# Altium PCB DK_LOCK_V1.0.PcbDoc
Units mm, origin at the board's own origin, x right, y up, seen from the top; angles counter-clockwise.
Board outline 115 x 43 mm, 2 copper layers (Top Layer, Bottom Layer); 92 components, 68 nets, 359 pads, 158 vias.
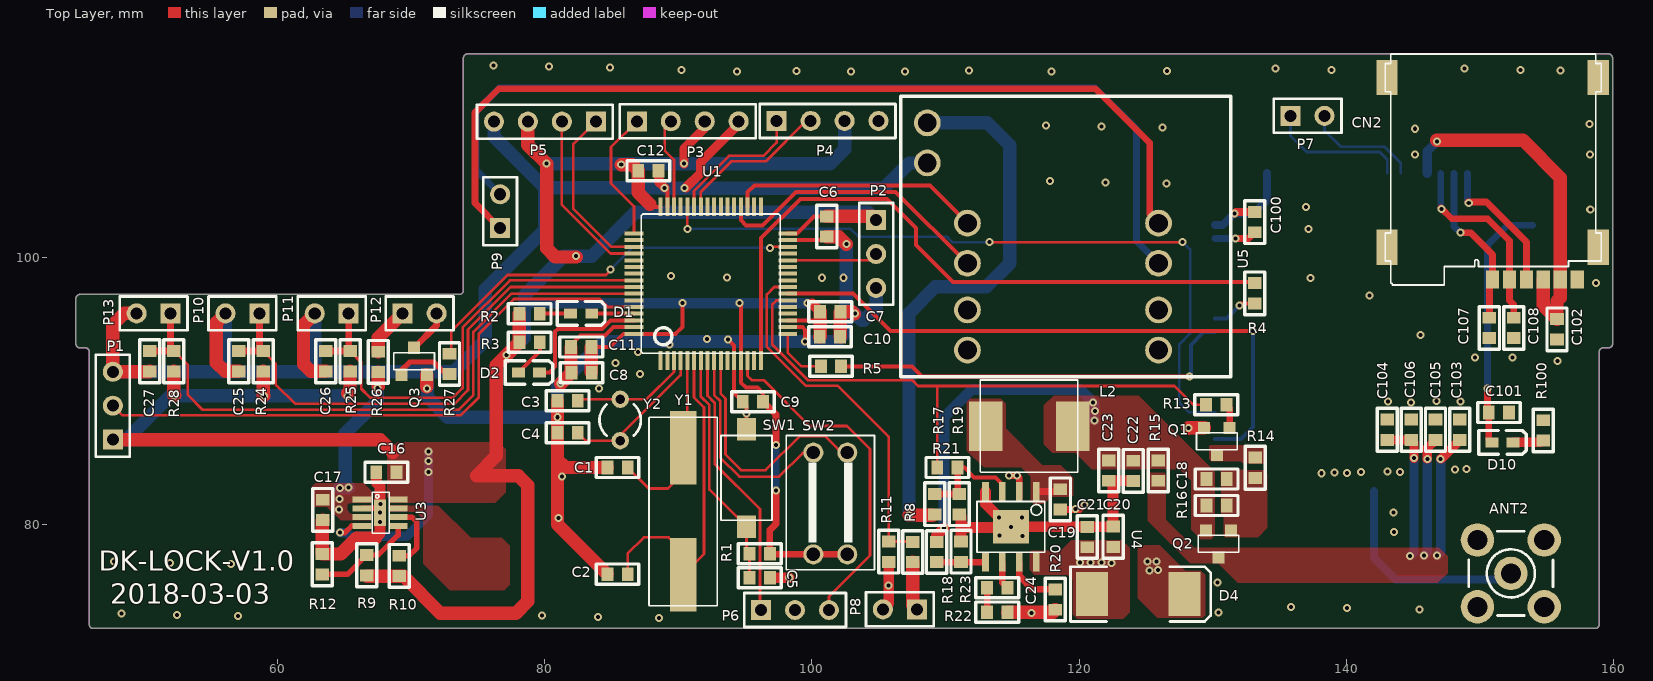
[diagram p0: Top Layer view]
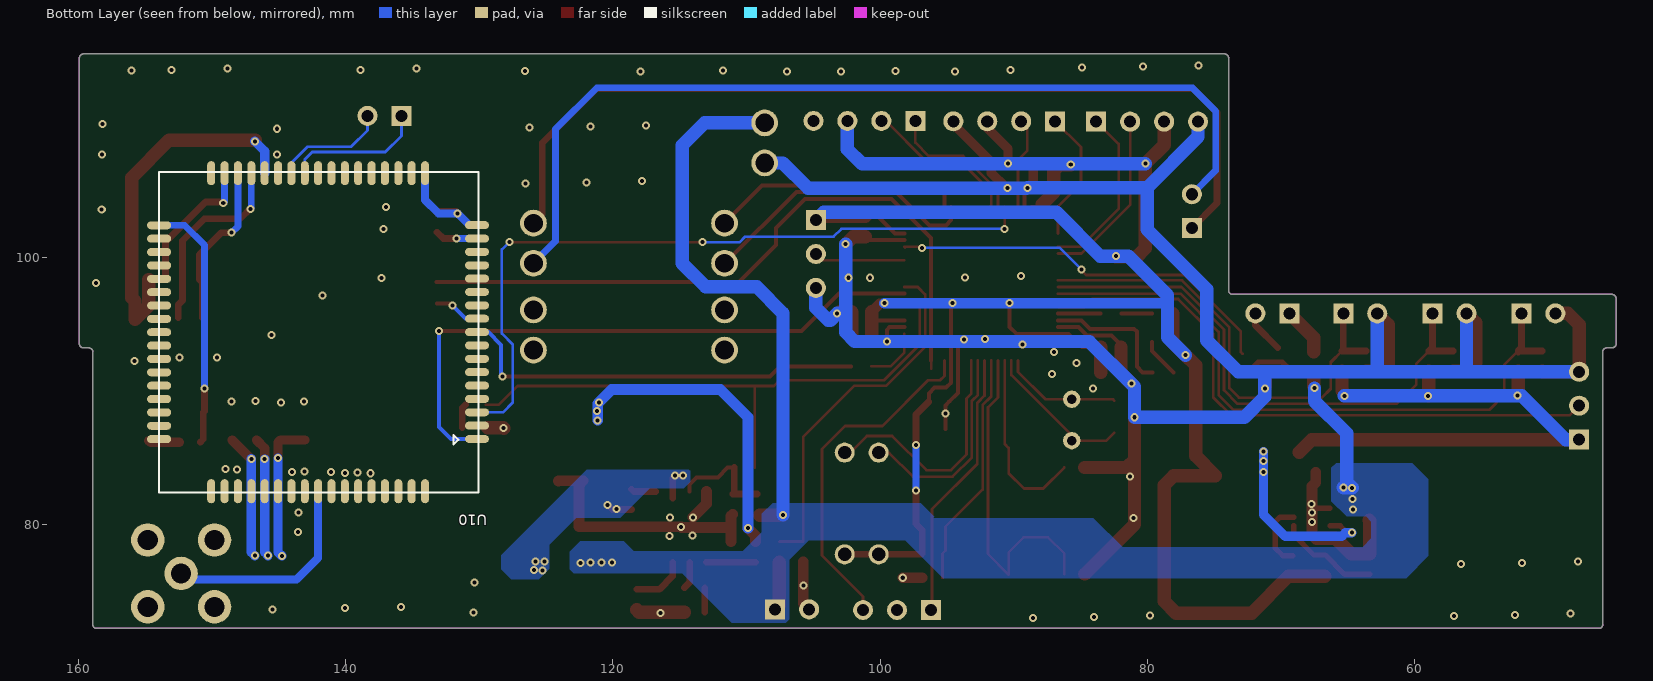
[diagram p1: Bottom Layer view, seen from below]

## Layer stack, top to bottom
Top Solder: solder mask 0.0102, Solder Resist, Dk 3.5
Top Layer: signal copper 0.0356
Dielectric 1: dielectric 0.32, FR-4, Dk 4.8
Bottom Layer: signal copper 0.0356
Bottom Solder: solder mask 0.0102, Solder Resist, Dk 3.5

## Board outline
45.913,92.954 ccw(c45.613,92.954) 45.613,93.254 45.213,93.254 cw(c45.213,93.554) 44.913,93.554 44.913,96.954 cw(c45.213,96.954) 45.213,97.254 73.613,97.254 ccw(c73.613,97.554) 73.913,97.554 73.913,114.954 cw(c74.213,114.954) 74.213,115.254 159.613,115.254 cw(c159.613,114.954) 159.913,114.954 159.913,93.554 cw(c159.613,93.554) 159.613,93.254 159.213,93.254 ccw(c159.213,92.954) 158.913,92.954 158.913,72.554 cw(c158.613,72.554) 158.613,72.254 46.213,72.254 cw(c46.213,72.554) 45.913,72.554

## Design rules (kind name [scope] priority, off if disabled: settings)
Clearance Clearance_2 [InPoly] p1 off: gap=0.5 ignorepadtopadclearanceinfootprint=FALSE
Clearance [All] p2: gap=0.15 ignorepadtopadclearanceinfootprint=FALSE
DiffPairsRouting d3 [All] p1: maxlimit=0.2 minlimit=0.2 mostfreqgap=0.2 toplayer_minwidth=0.2 toplayer_maxwidth=0.2 toplayer_prefwidth=0.2 bottomlayer_minwidth=0.2 bottomlayer_maxwidth=0.2 bottomlayer_prefwidth=0.2 maxuncoupledlength=12.7
DiffPairsRouting D1 [All] p2: maxlimit=0.2 minlimit=0.2 mostfreqgap=0.2 toplayer_minwidth=0.2 toplayer_maxwidth=0.2 toplayer_prefwidth=0.2 bottomlayer_minwidth=0.2 bottomlayer_maxwidth=0.2 bottomlayer_prefwidth=0.2 maxuncoupledlength=12.7
DiffPairsRouting d2 [All] p3: maxlimit=0.2 minlimit=0.2 mostfreqgap=0.2 toplayer_minwidth=0.2 toplayer_maxwidth=0.2 toplayer_prefwidth=0.2 bottomlayer_minwidth=0.2 bottomlayer_maxwidth=0.2 bottomlayer_prefwidth=0.2 maxuncoupledlength=12.7
DiffPairsRouting [All] p4: maxlimit=0.254 minlimit=0.254 mostfreqgap=0.254 toplayer_minwidth=0.381 toplayer_maxwidth=0.381 toplayer_prefwidth=0.381 bottomlayer_minwidth=0.381 bottomlayer_maxwidth=0.381 bottomlayer_prefwidth=0.381 maxuncoupledlength=12.7
MatchedLengths DiffPair_MatchedLengths [All] p1 off: tolerance=25.4 checknetsindiffpair=FALSE checkdiffpairvsdiffpair=TRUE checkxsignals=TRUE checkothers=TRUE
MatchedLengths DiffPair_MatchedLengths_1 [All] p2 off: tolerance=25.4 checknetsindiffpair=FALSE checkdiffpairvsdiffpair=TRUE checkxsignals=TRUE checkothers=TRUE
MatchedLengths DiffPair_MatchedLengths_2 [All] p3 off: tolerance=25.4 checknetsindiffpair=FALSE checkdiffpairvsdiffpair=TRUE checkxsignals=TRUE checkothers=TRUE
MinimumSolderMaskSliver [All] p1: minsoldermaskwidth=0
PolygonConnect [All] p1: connectstyle=Direct reliefconductorwidth=0.254 reliefentries=4 polygonreliefangle="90 Angle" airgapwidth=0.254
RoomDefinition POWER3.3V [InComponent('U3')] p1: confinementstyle=ConfineIn formatcopy=TRUE lockcomponents=FALSE outline 62.382,86.309 78.435,86.309 78.435,74.447 62.382,74.447
RoutingVias [All] p1: holewidth=0.3 width=0.6 viastyle="Through Hole" minholewidth=0.3 minwidth=0.6 maxholewidth=0.8 maxwidth=1.27
SilkToSilkClearance [All] p1: silktosilkclearance=0
SilkToSolderMaskClearance [IsPad] p1: minsilkscreentomaskgap=0 clearancetoexposedcopper=TRUE
SolderMaskExpansion [All] p1: expansion=0.102
Width [All] p1: maxlimit=2 minlimit=0.2 preferedwidth=0.5
26 further rules are at their usual default settings.

## Classes and differential pairs
component class U_DK_MOTO: C25 C26 C27 P9 P10 P11 P12 P13 R24 R25 R26 R27 R28 U5
component class U_DK_POWER: C16 C17 C18 C19 C20 C21 C22 C23 C24 L2 Q1 Q2 R8 R9 R10 R11 R12 R13 R14 R15 R16 R17 R18 R19 R20 R21 R22 R23 U3 U4
component class U_DK_STM32L151: C1 C2 C3 C4 C5 C6 C7 C8 C9 C10 C12 D1 D2 P1 P3 P4 P6 R1 R2 R3 R4 R5 SW1 SW2 U1 Y1 Y2
component class U_DK_GU600E_V10: ANT2 C100 C101 C102 C103 C104 C105 C106 C107 C108 CN2 D10 R100 U10
component class "Components Class 1": C16 R9 R10 U3
differential pair 1: +GPRS_RX2 -GPRS_TX2

## Components (designator, comment, footprint, x,y, rotation, side; value= is the part's Value field where it differs from the comment)
ANT2 "SMB" SMB_V-RJ45 152.298,76.378 r0 top
C1 "Cap" 0603 84.684,84.303 r0 top value=22pF
C2 "Cap" 0603 84.684,76.327 r0 top value=22pF
C3 "Cap" 0603 80.95,89.306 r0 top value=10pF
C4 "Cap" 0603 80.95,86.893 r0 top value=10pF
C5 "Cap" 0603 95.326,76.048 r0 top value=0.1uF
C6 "Cap" 0603 101.117,101.575 r90 top value=100nF
C7 "Cap" 0603 102.133,95.961 r180 top locked value=100nF
C8 "Cap" 0603 81.991,91.389 r0 top value=100nF
C9 "Cap" 0603 94.818,89.23 r0 top value=100nF
C10 "Cap" 0603 102.108,94.082 r180 top value=10uF
C11 "Cap" 0603 81.966,93.32 r0 top value=100nF
C12 "NC" 0603 88.519,106.502 r180 top value=10uF
C16 "Cap" 0603 67.386,83.947 r0 top value=4.7uF
C17 "Cap" 0603 63.398,80.366 r90 top value=4.7uF
C18 "Cap" 0603 129.515,83.439 r0 top value=2.2uF
C19 "Cap" 0603 118.593,82.677 r270 top value=0.1uF
C20 "Cap" 0603 122.53,79.883 r270 top value=10uF
C21 "Cap" 0603 120.599,79.858 r270 top value=10uF
C22 "Cap" 0603 124.054,83.287 r90 top value=22uF
C23 "Cap" 0603 122.199,83.312 r90 top value=22uF
C24 "Cap" 0603 114.63,75.311 r180 top value=2.7nF
C25 "Cap" 0603 57.099,91.491 r90 top value=0.1uF
C26 "Cap" 0603 63.602,91.491 r90 top value=0.1uF
C27 "Cap" 0603 50.444,91.491 r90 top value=0.1uF
C100 "Cap" 0603 133.147,103.429 r270 top value=1uF
C101 "Cap" 0603 152.171,88.417 r180 top value=100nF
C102 "Cap" 0603 155.753,93.878 r90 top value=100nF
C103 "Cap" 0603 148.488,87.884 r270 top value=39pF
C104 "Cap" 0603 143.053,87.884 r270 top value=39pF
C105 "Cap" 0603 146.66,87.884 r270 top value=100uF/6.3V
C106 "Cap" 0603 144.856,87.884 r270 top value=100uF/6.3V
C107 "Cap" 0603 150.698,93.98 r90 top value=39pF
C108 "Cap" 0603 152.527,93.98 r90 top value=39pF
CN2 "SIM_BLOCK" SIM_BLOCK 157.277,98.374 r180 top
D1 "LED0" LED0603 81.94,95.834 r0 top
D2 "LED0" LED0603 78.029,91.415 r0 top locked
D4 "Diode" SMC 124.414,74.828 r0 top
D10 "LED GREEN" LED0603 150.876,86.182 r0 top
L2 "Inductor" 0630 113.005,87.401 r0 top locked value=4.7uH
P1 "BOOT0" HDR1X3 47.676,86.385 r90 top
P2 "BOOT1" HDR1X3 104.8,102.819 r270 top
P3 "SWD" HDR1X4 86.893,110.211 r0 top
P4 "UART1" HDR1X4 97.358,110.236 r0 top
P5 "UART3" HDR1X4 83.82,110.185 r180 top
P6 "Header 3" HDR1X3 96.19,73.635 r0 top
P7 "Header 2" HDR1X2 135.814,110.617 r0 top
P8 "BATT" HDR1X2 107.848,73.685 r180 top
P9 "MOTOR" HDR1X2 76.657,102.21 r90 top
P10 "L_OFF" HDR1X2 58.649,95.834 r180 top locked
P11 "L_ON" HDR1X2 65.329,95.834 r180 top locked
P12 "BELL" HDR1X2 69.367,95.834 r0 top locked
P13 "BUTTON" HDR1X2 51.994,95.834 r180 top locked
Q1 "MOSFET-N" SOT-23A 130.302,86.258 r180 top
Q2 "MOSFET-P" SOT-23A 130.419,78.594 r180 top
Q3 "NPN" SOT-23A 70.231,92.253 r0 top
R1 "Res2" 0603 96.85,77.851 r180 top value=10K
R2 "Res2" 0603 79.629,95.809 r180 top value=1K
R3 "Res2" 0603 79.629,93.675 r180 top value=1K
R4 "Res2" 0603 133.147,96.571 r90 top value=3K
R5 "Res2" 0603 102.184,91.872 r180 top locked value=100R
R8 "Res2" 0603 107.544,78.74 r270 top value="30K %1"
R9 "Res2" 0603 66.675,77.749 r270 top value=300K
R10 "Res2" 0603 69.113,77.699 r270 top value=100K
R11 "Res2" 0603 105.74,78.765 r270 top value="10K %1"
R12 "Res2" 0603 63.348,77.826 r270 top value=100K
R13 "Res2" 0603 131.013,89.002 r180 top value=1K
R14 "Res2" 0603 133.172,83.515 r90 top value=10K
R15 "NC" 0603 125.908,84.836 r270 top value=0
R16 "Res2" 0603 129.515,81.458 r0 top value=100K
R17 "NC" 0603 109.195,82.321 r270 top value=0
R18 "Res2" 0603 109.322,77.216 r90 top value="91K 1%"
R19 "Res2" 0603 111.023,80.797 r90 top value=10K
R20 "Res2" 0603 118.212,73.66 r90 top value=137K
R21 "Res2" 0603 109.372,84.303 r0 top value=0
R22 "Res2" 0603 114.63,73.482 r180 top value=13K
R23 "Res2" 0603 111.15,78.765 r270 top value="24K 1%"
R24 "Res2" 0603 58.928,93.015 r270 top value=10K
R25 "Res2" 0603 65.43,93.015 r270 top value=10K
R26 "Res2" 0603 67.539,92.964 r270 top value=0
R27 "Res2" 0603 72.873,92.812 r270 top value=1K
R28 "Res2" 0603 52.248,93.015 r270 top value=10K
R100 "Res2" 0603 154.711,86.309 r90 top value=1K
SW1 "SW-PB" 3*6*4.3 95.098,83.523 r90 top locked
SW2 "SW DIP-2" SW-2*4 101.371,81.61 r0 top locked
U1 "STM32L151RCT6" LQFP64 92.425,98.06 r0 top locked
U3 "TPS62120" TPS62120 66.326,81.89 r270 top
U4 "RT7272B" RT7272B 116.789,82.508 r180 top
U5 "MOTO" moto 106.633,91.091 r0 top locked
U10 "GU900E" SIM900-68P 130.049,106.424 r0 bottom locked
Y1 "8M" SMT-OSC 90.373,85.776 r270 top locked
Y2 "32.768M" R38 85.649,87.859 r0 top

## Footprints (in the part's own frame and the unit in brackets; to place one, negate y for a bottom-side part, rotate by r counter-clockwise, add the part's x,y. Pads: shape width x height; smd on the part's side, far side on the other; paste and mask are expansions set on the pad)
3*6*4.3 [mm]
  rect 1.7x1.4 smd: 1(-3.65,0) 2(3.65,0)
  silkscreen extent -3.17,-1.91 3.17,1.91
0603 [mil]
  rect 35x40 smd: 1(0,0) 2(60,0)
  silkscreen extent -33,-30 93,30
0630 [mm]
  rect 2.5x3.7 smd: 1(0,0) 2(6.5,0)
  silkscreen extent -0.41,-3.45 6.88,3.45
HDR1X2 [mm] "Connector; Header; 2 Position"
  rect 1.5x1.5 hole 0.9: 1(0,0)
  round 1.5 hole 0.9: 2(2.54,0)
  silkscreen extent -1.27,-1.27 3.81,1.27
HDR1X3 [mm] "Connector; Header; 3 Position"
  rect 1.5x1.5 hole 0.9: 1(0,0)
  round 1.5 hole 0.9: 2(2.54,0) 3(5.08,0)
  silkscreen extent -1.27,-1.27 6.35,1.27
HDR1X4 [mm] "Connector; Header; 4 Position"
  rect 1.5x1.5 hole 0.9: 1(0,0)
  round 1.5 hole 0.9: 2(2.54,0) 3(5.08,0) 4(7.62,0)
  silkscreen extent -1.27,-1.27 8.89,1.27
LED0603 [mil]
  rect 38x30 smd: 1(0,0) 2(62,0)
  silkscreen extent -39,-35 101,35
LQFP64 [mm]
  rect 0.3x1.4 smd: 1(-3.75,-5.75) 2(-3.25,-5.75) 3(-2.75,-5.75) 4(-2.25,-5.75) 5(-1.75,-5.75) 6(-1.25,-5.75) 7(-0.75,-5.75) 8(-0.25,-5.75) 9(0.25,-5.75) 10(0.75,-5.75) 11(1.25,-5.75) 12(1.75,-5.75) 13(2.25,-5.75) 14(2.75,-5.75) 15(3.25,-5.75) 16(3.75,-5.75) 33(3.75,5.75) 34(3.25,5.75) 35(2.75,5.75) 36(2.25,5.75) 37(1.75,5.75) 38(1.25,5.75) 39(0.75,5.75) 40(0.25,5.75) 41(-0.25,5.75) 42(-0.75,5.75) 43(-1.25,5.75) 44(-1.75,5.75) 45(-2.25,5.75) 46(-2.75,5.75) 47(-3.25,5.75) 48(-3.75,5.75)
  rect 1.4x0.3 smd: 17(5.75,-3.75) 18(5.75,-3.25) 19(5.75,-2.75) 20(5.75,-2.25) 21(5.75,-1.75) 22(5.75,-1.25) 23(5.75,-0.75) 24(5.75,-0.25) 25(5.75,0.25) 26(5.75,0.75) 27(5.75,1.25) 28(5.75,1.75) 29(5.75,2.25) 30(5.75,2.75) 31(5.75,3.25) 32(5.75,3.75) 49(-5.75,3.75) 50(-5.75,3.25) 51(-5.75,2.75) 52(-5.75,2.25) 53(-5.75,1.75) 54(-5.75,1.25) 55(-5.75,0.75) 56(-5.75,0.25) 57(-5.75,-0.25) 58(-5.75,-0.75) 59(-5.75,-1.25) 60(-5.75,-1.75) 61(-5.75,-2.25) 62(-5.75,-2.75) 63(-5.75,-3.25) 64(-5.75,-3.75)
  silkscreen extent -5.21,-5.21 5.21,5.21
moto [mm]
  round 2 hole 1.4: 1(2,19) 2(5,11.5) 3(5,8.5) 4(5,5) 5(5,2) 6(19.3,2) 7(19.3,5) 8(19.3,8.5) 9(19.3,11.5) 10(2,16)
  silkscreen extent 0,0 24.7,21
R38 [mm] "Crystal, Thru-Hole; 2 Leads; Body 3.1 x 8.2 mm (Dia.xH)"
  round 1.3 hole 0.7: 1(0,1.55) 2(0,-1.55)
  silkscreen extent -1.55,-1.19 1.55,1.17
RT7272B [mm]
  rect 0.5x1.4 smd: 1(0,0) 2(1.27,0) 3(2.54,0) 4(3.81,0) 5(3.81,5.3) 6(2.54,5.3) 7(1.27,5.3) 8(0,5.304)
  rect 2.7x2.5 smd: 9(1.905,2.65)
  silkscreen extent -0.64,0.74 4.44,4.55
SIM900-68P [mm]
  oval 1.8x0.6 smd: 1(0.11,19.99) 2(0.11,18.99) 3(0.11,17.99) 4(0.11,16.99) 5(0.11,15.99) 6(0.11,14.99) 7(0.11,13.99) 8(0.11,12.99) 9(0.11,11.99) 10(0.11,10.99) 11(0.11,9.99) 12(0.11,8.99) 13(0.11,7.99) 14(0.11,6.99) 15(0.11,5.99) 16(0.11,4.99) 17(0.11,3.99) 35(23.9,4) 36(23.9,5) 37(23.9,6) 38(23.9,7) 39(23.9,8) 40(23.9,9) 41(23.9,10) 42(23.9,11) 43(23.9,12) 44(23.9,13) 45(23.9,14) 46(23.9,15) 47(23.9,16) 48(23.9,17) 49(23.9,18) 50(23.9,19) 51(23.9,20)
  oval 0.6x1.8 smd: 18(4,0.1) 19(5,0.1) 20(6,0.1) 21(7,0.1) 22(8,0.1) 23(9,0.1) 24(10,0.1) 25(11,0.1) 26(12,0.1) 27(13,0.1) 28(14,0.1) 29(15,0.1) 30(16,0.1) 31(17,0.1) 32(18,0.1) 33(19,0.1) 34(20,0.1) 52(20,23.9) 53(19,23.9) 54(18,23.9) 55(17,23.9) 56(16,23.9) 57(15,23.9) 58(14,23.9) 59(13,23.9) 60(12,23.9) 61(11,23.9) 62(10,23.9) 63(9,23.9) 64(8,23.9) 65(7,23.9) 66(6,23.9) 67(5,23.9) 68(4,23.9)
  silkscreen extent -0.01,0.01 23.92,24
SIM_BLOCK [mm]
  rect 1x1.35 smd: C1(1.27,0) C2(3.81,0) C3(6.35,0) C5(0,0) C6(2.54,0) C7(5.08,0)
  rect 1.6x2.65 smd: C4(-1.575,-2.413) C8(-1.575,-15.113) C9(14.249,-15.113) C10(14.249,-2.413)
  silkscreen extent -1.79,-16.87 14.39,0.41
SMB_V-RJ45 [mm] "Connector; SMB Straight"
  round 2.5 hole 1.5: 1(0,0) 2(-2.5,-2.5) 2(-2.5,2.5) 2(2.5,-2.5) 2(2.5,2.5)
  silkscreen extent -3.15,-3.15 3.15,3.15
SMC [mm] "DO-214-AB/SMC; 2 C-Bend Leads; Body 7.9 x 5.9 mm, inc. leads (LxW)"
  rect 2.4x3.3 smd: 1(-3.475,0) 2(3.475,0)
  silkscreen extent -5.07,-2.05 5.43,2.05
SMT-OSC [mm]
  rect 5.5x2 smd: 1(0,0) 2(9.5,0)
  silkscreen extent -2.29,-2.57 11.81,2.54
SOT-23A [mm]
  rect 0.9x0.9 smd: 1(-0.95,-1.01) 2(0,1.01) 3(0.95,-1.01)
  silkscreen extent -1.52,-0.64 1.52,0.64
SW-2*4 [mm]
  round 1.5 hole 1: 1(-1.27,-3.81) 2(1.27,-3.81) 3(1.27,3.81) 4(-1.27,3.81)
  silkscreen extent -3.3,-4.95 3.3,5.08
TPS62120 [mm]
  rect 0.45x1.4 smd: 1(0,0) 2(0.65,0) 3(1.3,0) 4(1.95,0) 5(1.95,2.7) 6(1.3,2.7) 7(0.65,2.7) 8(0,2.7)
  rect 2x0.9 smd: 9(0.975,1.35)
  silkscreen extent -0.55,0.76 2.5,2.03

## Part data
ANT2: "SMB Straight Connector", LatestRevisionDate=17-Jul-2002, LatestRevisionNote="Re-released for DXP Platform.", Publisher="Altium Limited"
C1 C2 C3 C4 C5 C6 C7 C8 C9 C10 C11 C16 C17 C18 C19 C20 C21 C22 C23 C24 C25 C26 C27 C100 C101 C102 C103 C104 C105 C106 C107 C108: "Capacitor", LatestRevisionDate=17-Jul-2002, LatestRevisionNote="Re-released for DXP Platform.", PackageDescription="Radial Cap, Thru-Hole; 2 Leads; 0.3 in Pin Spacing", PackageReference=RAD-0.3, Published=8-Jun-2000, Publisher="Altium Limited"
C12: library part Cap, "Capacitor", LatestRevisionDate=17-Jul-2002, LatestRevisionNote="Re-released for DXP Platform.", PackageDescription="Radial Cap, Thru-Hole; 2 Leads; 0.3 in Pin Spacing", PackageReference=RAD-0.3, Published=8-Jun-2000, Publisher="Altium Limited"
CN2: library part SIM_BLOCK_2
D1 D2: "Typical INFRARED GaAs LED", LatestRevisionDate=08-Jul-2005, LatestRevisionNote="Mech Layer 1 removed.", PackageDescription="LED; 2 Leads", PackageReference=LED-0, Published=8-Jun-2000, Publisher="Altium Limited"
D4: "Default Diode", Code_JEDEC=DO-214-AB, LatestRevisionDate=17-Jul-2002, LatestRevisionNote="Re-released for DXP Platform.", PackageDescription="DO-214-AB/SMC; 2 C-Bend Leads; Body 7.9 x 5.9 mm, inc. leads (LxW)", PackageReference=SMC, PackageVersion=Sep-1996, Published=8-Jun-2000, Publisher="Altium Limited"
D10: library part LED2, "Typical RED, GREEN, YELLOW, AMBER GaAs LED", LatestRevisionDate=17-Jul-2002, LatestRevisionNote="Re-released for DXP Platform.", PackageDescription="SM LED; 2 Flat Leads", PackageReference=3.2X1.6X1.1, PackageVersion=Feb-2002, Published=8-Jun-2000, Publisher="Altium Limited"
P1 P2: library part "Header 3", "Header, 3-Pin", LatestRevisionDate=17-Jul-2002, LatestRevisionNote="Re-released for DXP Platform.", Publisher="Altium Limited"
P3 P4 P5: library part "Header 4", "Header, 4-Pin", LatestRevisionDate=17-Jul-2002, LatestRevisionNote="Re-released for DXP Platform.", Publisher="Altium Limited"
P6: "Header, 3-Pin", LatestRevisionDate=17-Jul-2002, LatestRevisionNote="Re-released for DXP Platform.", Publisher="Altium Limited"
P7: "Header, 2-Pin", LatestRevisionDate=17-Jul-2002, LatestRevisionNote="Re-released for DXP Platform.", Publisher="Altium Limited"
P8 P9 P10 P11 P12 P13: library part "Header 2", "Header, 2-Pin", LatestRevisionDate=17-Jul-2002, LatestRevisionNote="Re-released for DXP Platform.", Publisher="Altium Limited"
Q1: library part NMOS-2, "N-Channel Power MOSFET", ComponentLink1Description="Manufacturer Link", ComponentLink1URL=http://www.irf.com/, DatasheetVersion=PD-9.814, LatestRevisionDate=17-Jul-2002, LatestRevisionNote="Re-released for DXP Platform.", Note="Pin 2 is electrically connected to pin 4.", PackageDescription="TO, Thru-Hole, Vertical, Heatsink Mounted; 3 In-Line Leads; Pitch 2.54 mm", PackageReference=TO-220AB, PackageVersion=Feb-1997, Published=8-Jun-2000, Publisher="Altium Limited"
Q2: library part PMOS-2, "P-Channel Power MOSFET", ComponentLink1Description="Manufacturer Link", ComponentLink1URL=http://www.irf.com/, DatasheetVersion=PD-9.390D, LatestRevisionDate=17-Jul-2002, LatestRevisionNote="Re-released for DXP Platform.", Note="Pin 4 not drawn and electrically connected to Pin 2.", PackageDescription="TO, Thru-Hole, Vertical, Heatsink Mounted; 3 In-Line Leads; Pitch 2.54 mm", PackageReference=TO-220AB, PackageVersion=Feb-1997, Published=8-Jun-2000, Publisher="Altium Limited"
Q3: "NPN Bipolar Transistor", Code_JEDEC=TO-226-AA, LatestRevisionDate=17-Jul-2002, LatestRevisionNote="Re-released for DXP Platform.", PackageDescription="TO, Flat Index; 3 In-Line, Axial Leads; Body Dia. 4.8mm; Leads 0.55 x 0.51 mm (max)", PackageReference=TO-226-AA, Published=8-Jun-2000, Publisher="Altium Limited"
R1 R2 R3 R4 R5 R8 R9 R10 R11 R12 R13 R14 R16 R18 R19 R20 R21 R22 R23 R24 R25 R26 R27 R28 R100: "Resistor", LatestRevisionDate=17-Jul-2002, LatestRevisionNote="Re-released for DXP Platform.", PackageDescription="Axial Device, Thru-Hole; 2 Leads; 0.4 in Pin Spacing", PackageReference=AXIAL-0.4, Published=8-Jun-2000, Publisher="Altium Limited"
R15 R17: library part Res2, "Resistor", LatestRevisionDate=17-Jul-2002, LatestRevisionNote="Re-released for DXP Platform.", PackageDescription="Axial Device, Thru-Hole; 2 Leads; 0.4 in Pin Spacing", PackageReference=AXIAL-0.4, Published=8-Jun-2000, Publisher="Altium Limited"
SW1: "Switch", LatestRevisionDate=17-Jul-2002, LatestRevisionNote="Re-released for DXP Platform.", PackageDescription="Switch; 2 Leads", PackageReference=SPST-2, Published=24-Mar-1999, Publisher="Altium Limited"
SW2: "DIP Switch, 2 Position, SPST", LatestRevisionDate=17-Jul-2002, LatestRevisionNote="Re-released for DXP Platform.", PackageReference=DIP-4, Published=24-Mar-1999, Publisher="Altium Limited"
U1: "ARM Cortex-M3 32-bit MCU, 256 KB Flash, 32 KB Internal RAM, 51 I/Os, 64-pin LQFP, -40 to 85 degC, Tray", I/Os (High Current)=51, Manufacturer=STMicroelectronics, Operating Frequency(F) (Processor speed) (MHz)=32, Supply Voltage(Vcc) min (V)=1.65, ComponentLink1Description="Manufacturer URL", ComponentLink1URL=http://www.st.com/web/en/home.html, ComponentLink2Description=Datasheet, ComponentLink2URL=http://www.st.com/st-web-ui/static/active/en/resource/technical/document/datasheet/DM00048356.pdf, ComponentLink3Description="Package Specification", ComponentLink3URL=http://www.st.com/st-web-ui/static/active/en/resource/technical/document/datasheet/DM00037051.pdf, Core="ARM Cortex-M3", D/A Converter="2x12-bit (2 Channel)", Data E2PROM nom (B)=8192, DatasheetVersion="Rev. 3", FLASH Size (Prog) (kB)=256, Internal RAM Size (kB)=32, Mounting Technology="Surface Mount", PackageDescription="64-Pin Low Profile Quad Flat Package, 10 x 10 mm Body, 0.5 mm Pitch", PackageReference=LQFP64, PackageVersion="Rev. 4, 06/2013", Packing=Tray, PartNumber=STM32L151RCT6
Y1 Y2: library part XTAL, "Crystal Oscillator", LatestRevisionDate=17-Jul-2002, LatestRevisionNote="Re-released for DXP Platform.", PackageDescription="Crystal, Thru-Hole; 2 Leads; Body 3.1 x 8.2 mm (Dia.xH)", PackageReference=R38, Published=8-Jun-2000, Publisher="Altium Limited"
L2: Code_IEC=1005, Code_JEITA=0402, LatestRevisionDate=29-May-2009, LatestRevisionNote="IPC-7351 Footprint Added.", PackageDescription="Chip Inductor", PackageReference=0402-A, Published=8-Jun-2000, Publisher="Altium Limited"

## Via types
v1: diameter 0.6, hole 0.3, Top Layer to Bottom Layer, tented both sides, 158 vias

## Nets (pads, with @x,y where several pads share a name; then routed paths per layer and width w, separated by ;. In a path a pad name is that pad's centre, name@x,y a point inside that pad or via, vN(x,y) a via of type N, cw(c..) or ccw(c..) an arc to the next point about the centre after c; other vN are vias at no path point)
BATT: C17.2 C20.2 C21.2 D4.1 P8.1 R8.2 R17.2 R26.2 U3.1 U3.3 U4.8 U5.1 | length 55.7
  Top Layer w1: v1@67.539,90.379 R26.2 ; v1(107.264,80.747) 107.29,80.721 R17.2@108.991,80.721 ; R8.2 107.544,73.99 P8.1
  Bottom Layer w1: v1(65.329,82.804) 65.303,82.779 v1(64.668,82.779) 65.075,83.185 65.075,86.868 67.488,89.281 v1(67.488,90.246) ; v1(107.264,80.747) 107.264,95.86 109.22,97.815 113.055,97.815 114.808,99.568 114.808,108.407 113.125,110.091 U5.1
  other v1: 122.428,77.14 120.066,77.191 120.828,77.191 121.666,77.191 64.618,81.153 64.643,81.94
BOOT0: P1.2 U1.60 | length 45.9
  Top Layer w0.2: P1.2 48.381,88.221 73.724,88.221 75.06,89.557 75.06,94.288 77.682,96.91 84.116,96.91 84.716,96.31 U1.60
BOOT1: P2.2 U1.28 | length 6.8
  Top Layer w0.2: U1.28 104.331,99.81 P2.2
GND: ANT2.2 C1.1 C2.1 C3.1 C4.1 C5.2 C6.1 C7.1 C8.1 C9.1 C10.1 C11.1 C12.1 C16.1 C17.1 C20.1 C21.1 C22.1 C23.1 C25.1 C26.1 C27.1 C100.1 C101.1 C102.1 C103.1 C104.1 C105.1 C106.1 C107.1 C108.1 CN2.C4 CN2.C5 CN2.C8 CN2.C9 CN2.C10 P1.3 P2.3 P3.4 P4.4 P5.4 P8.2 P10.2 P11.2 P13.2 Q1.3 Q3.3 R11.2 R12.1 R19.1 R20.1 R22.1 R23.1 R100.2 SW1.2 U1.12 U1.18 U1.31 U1.47 U1.63 U3.2 U3.9 U4.4 U4.9 U5.10 U10.17 U10.18 U10.29 U10.37 U10.39 U10.45 U10.46 U10.53 U10.54 U10.58 U10.59 U10.61 U10.62 U10.63 U10.64 | length 263.3
  Top Layer w0.3: C11.1 81.966,93.466 82.677,94.178 84.496,94.178 85.128,94.81 U1.63 ; v1(88.976,105.232) 89.175,105.032 U1.47 ; v1(93.726,93.878) 94.175,93.429 U1.12 94.175,89.873 C9.1 95.098,88.951 v1(95.098,88.341) SW1.2 ; U1.18 99.272,94.81 99.492,94.59 v1(99.492,93.726) ; U1.31 100.853,101.31 C6.1
  Top Layer w0.4: U3.2 67.351,81.24 v1(67.666,80.925)
  Top Layer w0.6: v1(131.623,103.327) 131.724,103.429 C100.1
  Top Layer w0.7: C12.1 88.519,105.689 v1(88.976,105.232) ; v1@90.575,105.248 91.669,106.342 91.669,107.163 94.513,110.007 P3.4
  Top Layer w0.8: 67.316,79.015 67.666,79.364 v1(67.666,80.239) U3.9@67.666,80.915 ; C16.1 67.386,83.185 67.666,82.906 v1(67.666,80.925) ; C5.2 v1@98.298,76.048 ; P8.2 105.74,74.117 v1(105.74,75.463) R11.2 ; R19.1 111.15,80.67 111.15,79.807 ; R23.1 111.15,79.807 ; U4.4 112.979,81.585 v1(113.995,80.569) ; C22.1 124.028,83.312 C23.1 122.53,82.982 C20.1 122.504,79.858 C21.1 v1(114.884,79.858) 114.833,79.807 111.15,79.807
  Top Layer w1: P13.2 48.539,95.834 47.676,94.971 P1.3 50.419,91.465 C27.1 ; P10.2 55.423,95.148 55.423,92.151 56.083,91.491 C25.1 ; P11.2 61.951,94.996 61.951,92.024 62.484,91.491 C26.1 ; C17.1 63.348,80.315 R12.1 64.722,77.826 65.911,79.015 67.316,79.015 ; v1@71.181,90.329 Q3.3 ; C3.1 v1(80.95,88.062) C4.1 80.95,84.887 ; v1(81.178,90.576) C8.1 81.966,91.415 C11.1 ; C2.1 80.95,80.061 80.95,83.617 80.95,84.887 ; C1.1 81.534,84.303 80.95,84.887 ; C6.1 102.006,101.575 v1(102.565,101.016) ; C10.1 102.108,95.936 C7.1 102.989,95.961 v1@103.158,95.792 ; R22.1 118.034,73.482 R20.1 ; v1(128.168,87.249) 128.188,87.268 Q1.3
  Bottom Layer w0.6: U10.17 130.73,102.434 v1(131.623,103.327) 133.045,103.327 134.049,104.331 U10.18
  Bottom Layer w1: P1.3 56.109,91.465 ; P10.2 56.109,91.465 ; P11.2 62.789,91.542 62.865,91.465 ; P5.4 76.2,109.042 80.01,105.232 ; v1(102.565,101.016) 102.565,94.412 101.879,93.726 v1(99.492,93.726) 84.328,93.726 v1(81.178,90.576) 80.95,90.348 v1(80.95,88.062) 72.72,88.062 71.196,89.586 v1(71.196,90.195) 71.196,91.415 71.247,91.465 ; v1(103.2,95.834) 103.708,95.326 103.861,95.326 104.8,96.266 P2.3 ; U5.10 107.268,107.091 105.385,105.207 v1(90.449,105.207) 89.002,105.207 v1(88.976,105.232) 80.01,105.232 ; 56.109,91.465 62.865,91.465 ; 62.865,91.465 71.247,91.465 ; 71.247,91.465 73.203,91.465 75.54,93.802 75.54,97.638 80.01,102.108 80.01,105.232
  other v1: 88.544,73.05 83.972,73.127 57.048,73.203 79.807,73.228 52.476,73.279 48.311,73.381 116.434,73.406 130.429,73.457 145.466,73.685 140.03,73.787 135.839,73.863 130.353,75.692 98.298,76.051 56.515,77.089 51.943,77.165 47.777,77.267 115.748,79.172 114.021,79.197 143.561,79.477 81.026,80.518 115.722,80.569 143.51,80.924 67.691,81.559 81.305,83.617 138.125,83.871 140.03,83.896 139.09,83.922 141.072,83.947 144.018,83.972 143.078,83.998 148.107,84.15 148.996,84.176 144.831,89.179 143.104,89.23 148.539,89.23 146.736,89.281 84.074,90.221 87.122,91.313 85.293,92.126 155.778,92.278 149.606,92.532 152.425,92.532 86.995,92.939 89.325,93.52 92.126,93.904 145.542,94.209 141.732,97.155 158.674,98.12 137.312,98.476 100.762,98.501 102.362,98.501 93.624,98.527 89.459,98.628 137.16,102.159 158.242,103.607 136.982,103.81 126.543,105.562 121.971,105.639 117.805,105.74 145.136,107.721 158.217,107.721 145.136,109.652 126.238,109.728 121.666,109.804 117.5,109.906 158.191,110.007 94.386,113.944 102.921,113.944 106.959,113.944 117.932,113.944 98.831,113.97 126.568,113.97 156.032,113.995 111.735,114.021 90.221,114.046 138.862,114.046 153.01,114.046 134.696,114.148 148.844,114.148 84.887,114.224 80.315,114.3 76.149,114.402
GPRS_PWR: R13.2 R21.1 U1.22 | length 44.7
  Top Layer w0.2: U1.22 97.343,96.81 97.025,96.492 97.025,93.493 99.688,90.83 107.518,90.83 107.95,90.399 109.347,90.399 ; R21.1 109.372,90.373 109.347,90.399 ; R13.2 128.524,89.002 127.127,90.399 109.347,90.399
GPRS_RX2: P7.2 U10.28 | length 8.6
  Bottom Layer w0.2: P7.2 138.354,109.525 139.573,108.306 142.85,108.306 144.049,107.106 U10.28
GPRS_TX2: P7.1 U10.27 | length 10.5
  Bottom Layer w0.2: P7.1 135.814,109.118 137.027,107.906 142.488,107.906 143.049,107.344 U10.27
GSM_GPRS: C101.2 D10.1 U10.35 | length 18.9
  Top Layer w0.5: v1(150.546,90.221) 150.546,88.519 C101.2 150.647,86.411 D10.1
  Bottom Layer w0.5: v1(150.546,90.221) 150.546,100.94 152.031,102.424 U10.35
L_OFF: C25.2 P10.1 R24.1 U1.57 | length 41.3
  Top Layer w0.2: R24.1 59.868,92.075 59.868,90.526 61.331,89.062 73.238,89.062 74.26,90.085 74.26,94.62 77.451,97.81 U1.57
  Top Layer w0.5: C25.2 R24.1 58.649,93.294 P10.1
L_ON: C26.2 P11.1 R25.1 U1.56 | length 34.8
  Top Layer w0.2: R25.1 66.269,92.177 66.269,90.195 66.935,89.529 73.139,89.529 73.86,90.25 73.86,94.785 77.385,98.31 U1.56
  Top Layer w0.5: C26.2 R25.1 65.329,93.116 P11.1
LED0: D1.2 U1.61 | length 3.2
  Top Layer w0.3: D1.2 83.515,95.81 U1.61
LED1: D2.2 U1.62 | length 10.2
  Top Layer w0.3: D2.2 80.34,91.415 80.772,91.846 80.772,94.463 80.987,94.678 84.289,94.678 84.921,95.31 U1.62
MCU_RX1: P4.1 U1.43 | length 10.5
  Top Layer w0.2: U1.43 91.175,105 93.795,107.62 96.368,107.62 97.358,108.61 P4.1
MCU_TX1: P4.2 U1.42 | length 11.6
  Top Layer w0.2: U1.42@91.725,103.86 U1.42 91.675,104.934 93.961,107.22 96.552,107.22 99.568,110.236 P4.2
MOTO1: U1.35 U5.2 | length 18.9
  Top Layer w0.3: U1.35 95.175,104.903 95.682,105.41 108.814,105.41 U5.2
MOTO2: U1.36 U5.3 | length 21.4
  Top Layer w0.3: U1.36 94.675,102.81 95.072,102.413 96.291,102.413 98.789,104.91 106.266,104.91 111.585,99.591 U5.3
MOTOR1: P9.1 U5.9 | length 69
  Top Layer w0.5: P9.1 74.778,104.089 74.778,110.871 76.556,112.649 121.209,112.649 125.273,108.585 125.273,103.251 U5.9 U5.9@126.34,102.591
MOTOR2: P9.2 U5.8 | length 69.1
  Bottom Layer w0.5: P9.2 74.879,106.528 74.879,110.973 76.618,112.711 121.198,112.711 124.282,109.626 124.282,101.244 125.933,99.593 U5.8
NetANT2_1: ANT2.1 U10.60 | length 16.1
  Bottom Layer w0.6: U10.60 142.049,77.534 143.662,75.921 151.841,75.921 ANT2.1
NetC18_1: C18.1 C22.2 C23.2 L2.2 Q2.3 R15.1 R16.1 R18.2 | length 23.4
  Top Layer w0.8: R18.2 109.322,79.194 v1@109.88,79.753
  Bottom Layer w0.8: v1(109.88,79.756) 109.88,88.062 111.963,90.145 120.066,90.145 v1(121.031,89.179) 121.133,89.078 v1(121.133,87.833)
  other v1: 121.183,88.544
NetC18_2: C18.2 Q2.1 R14.1 R16.2
NetC19_1: C19.1 L2.1 U4.1 | length 1.9
  Top Layer w0.5: U4.1 118.423,82.508 C19.1
NetC19_2: C19.2 D4.2 U4.2 | length 4.3
  Top Layer w0.5: v1(114.757,83.693) v1(115.341,83.693) 115.519,83.515 U4.2 U4.2@115.519,81.989 ; C19.2 120.04,81.153 v1(120.396,81.509)
  other v1: 125.247,76.606 125.882,76.632 125.095,77.267 125.781,77.267 119.736,81.178
NetC24_1: C24.1 U4.6 | length 2.1
  Top Layer w0.5: U4.6 114.249,75.692 C24.1
NetC24_2: C24.2 R22.2 | length 1.8
  Top Layer w0.5: R22.2 C24.2
NetC100_2: C100.2 U10.16 | length 3.2
  Top Layer w0.5: v1(131.711,101.434) 132.676,101.434 C100.2
  Bottom Layer w0.5: U10.16 v1(131.711,101.434)
NetD1_1: D1.1 R2.1 | length 2.4
  Top Layer w0.2: D1.1@81.915,95.809 D1.1
  Top Layer w0.3: R2.1 79.654,95.834 D1.1
NetD2_1: D2.1 R3.1 | length 2.9
  Top Layer w0.3: D2.1 79.629,93.015 R3.1
NetD10_2: D10.2 R100.1 | length 2.3
  Top Layer w0.7: D10.2 154.584,86.182 R100.1
NetL1_1: U3.7
NetP12_1: P12.1 R26.1 | length 3.6
  Top Layer w1: R26.1 67.539,94.005 P12.1
NetP12_2: P12.2 Q3.2 | length 3.3
  Top Layer w0.5: Q3.2 71.907,94.939 P12.2
NetQ1_1: Q1.1 R13.1 | length 1.8
  Top Layer w0.5: R13.1 131.252,88.763 Q1.1
NetQ1_2: Q1.2 R14.2
NetQ3_2: Q3.1 R27.2 | length 4.6
  Top Layer w0.4: Q3.1 69.281,91.582 69.901,92.202 71.687,92.202 72.031,91.858 72.031,91.85 72.593,91.288 R27.2
NetR4_1: R4.1 U10.10 | length 3.5
  Top Layer w0.3: v1(132.004,96.418) 132.156,96.571 R4.1
  Bottom Layer w0.3: U10.10 131.02,95.434 v1(132.004,96.418)
NetR4_2: R4.2 U1.16 | length 51.3
  Top Layer w0.2: U1.16@96.175,91.683 U1.16
  Top Layer w0.3: U1.16 96.175,101.458 99.127,104.41 105.597,104.41 107.772,102.235 107.772,100.965 110.566,98.171 R4.2@133.198,98.171
NetR5_1: R5.1 U10.9 | length 30.9
  Top Layer w0.3: R5.1 107.467,91.872 108.229,91.11 v1@128.118,91.11
  Bottom Layer w0.3: v1(128.245,91.11) 128.346,91.211 128.346,93.472 129.309,94.434 U10.9
NetR5_2: R5.2 U1.17 | length 4.3
  Top Layer w0.2: U1.17 98.175,92.909 99.212,91.872 R5.2
NetR8_1: R8.1 R11.1 U1.24 | length 27.3
  Top Layer w0.2: U1.24 97.175,97.81 96.625,97.26 96.625,93.328 99.522,90.43 101.924,90.43 105.74,86.614 R11.1 107.518,78.765 R8.1
NetR9_1: R9.1 R12.2 U3.5 | length 7.6
  Top Layer w0.4: R12.2 65.227,76.302 R9.1 67.539,77.749 69.026,79.237 U3.5
NetR10_1: R10.1 U3.6 | length 5.1
  Top Layer w0.4: U3.6 70.058,80.59 70.434,80.213 70.434,78.283 69.85,77.699 R10.1
NetR17_1: R17.1 R19.2 R21.2 U4.3 | length 8.3
  Top Layer w0.3: R21.2 111.404,84.303 112.141,83.566 113.716,83.566 114.249,83.033 U4.3
  Top Layer w0.5: R17.1 R19.2 110.896,82.448 R21.2
NetR18_1: R18.1 R23.2 U4.5 | length 3.7
  Top Layer w0.5: R18.1 112.971,77.216 U4.5
NetR20_2: R20.2 U4.7 | length 4.1
  Top Layer w0.5: U4.7 115.519,76.175 116.51,75.184 R20.2
NetR27_1: R27.1 U1.30 | length 29.6
  Top Layer w0.2: R27.1 72.997,92.936 72.997,94.488 77.219,98.71 84.582,98.71 84.912,99.04 v1(84.912,99.111) ; v1(96.85,100.736) 96.924,100.81 U1.30 U1.30@98.125,100.76
  Bottom Layer w0.2: v1(84.912,99.111) 86.538,100.736 v1(96.85,100.736)
NetU1_44: U1.44 U10.3 | length 54.7
  Top Layer w0.2: v1@90.675,102.085 v1(90.675,102.159) U1.44 ; v1(113.284,101.168) v1(127.737,101.168)
  Bottom Layer w0.2: v1(90.675,102.159) 102.895,102.159 103.48,101.575 110.084,101.575 110.49,101.168 v1(113.284,101.168) ; v1(127.737,101.168) 128.295,100.609 128.295,94.336 127.483,93.523 127.483,89.179 128.228,88.434 U10.3
OSC32_IN: C3.2 U1.3 Y2.1 | length 8.9
  Top Layer w0.2: C3.2 82.576,89.409 Y2.1 87.631,89.409 89.675,91.453 U1.3
OSC32_OUT: C4.2 U1.4 Y2.2 | length 11.3
  Top Layer w0.2: C4.2 83.059,86.309 Y2.2 85.649,86.69 90.175,91.217 U1.4
OSC_IN: C1.2 U1.5 Y1.1 | length 13.9
  Top Layer w0.2: C1.2 87.782,82.728 89.23,82.728 90.373,83.871 Y1.1 90.675,86.078 U1.5
OSC_OUT: C2.2 U1.6 Y1.2 | length 25.3
  Top Layer w0.2: C2.2 86.208,77.851 87.427,79.07 89.256,79.07 90.373,77.953 Y1.2 91.923,77.825 91.923,88.798 91.175,89.546 U1.6
PA0: P6.3 U1.14 | length 25.9
  Top Layer w0.2: U1.14 95.175,91.159 95.504,90.83 96.393,90.83 99.822,87.401 102.616,87.401 104.343,85.674 104.343,77.724 101.27,74.651 P6.3
PC0: P6.1 U1.8 | length 20.6
  Top Layer w0.2: U1.8 92.175,89.677 92.723,89.13 92.723,84.569 96.106,81.186 96.106,73.719 P6.1 P6.1@96.342,73.787
PC1: SW2.4 U1.9 | length 15.4
  Top Layer w0.2: U1.9 92.675,89.743 93.123,89.295 93.123,85.058 94.564,83.617 97.536,83.617 99.314,85.395 SW2.4@99.72,85.395
PC2: SW2.3 U1.10 | length 18
  Top Layer w0.2: U1.10 93.175,89.809 93.523,89.461 93.523,85.268 94.691,84.099 96.52,84.099 99.085,86.665 100.99,86.665 SW2.3@102.26,85.395
PWON: U1.23 U10.1 | length 46.4
  Top Layer w0.3: U1.23 103.071,97.31 105.867,94.513 v1(132.994,94.513)
  Bottom Layer w0.3: U10.1 132.104,86.434 132.994,87.325 v1(132.994,94.513)
RESET: C5.1 R1.2 SW1.1 U1.7 | length 17.8
  Top Layer w0.2: U1.7 91.675,89.611 92.323,88.964 92.323,82.648 SW1.1 95.098,78.08 R1.2 C5.1
RX3: P5.2 U1.52 | length 13.1
  Top Layer w0.2: P5.2 81.28,103.953 84.924,100.31 U1.52
SIM_CLK: C107.2 CN2.C3 U10.32 | length 12.4
  Top Layer w0.5: v1@148.666,101.879 149.276,101.879 150.927,100.228 CN2.C3 150.698,98.146 C107.2
  Bottom Layer w0.5: U10.32 148.049,102.344 v1(148.514,101.879)
SIM_DATA: C108.2 CN2.C7 U10.31 | length 14.8
  Top Layer w0.5: v1@147.066,103.734 147.879,102.921 150.546,102.921 152.197,101.27 CN2.C7 152.197,96.799 152.527,96.469 C108.2
  Bottom Layer w0.5: U10.31@147.056,106.317 U10.31 147.049,103.725 v1(147.117,103.657)
SIM_RST: CN2.C2 U10.33 | length 10.7
  Top Layer w0.5: v1@149.098,104.165 150.47,104.165 153.467,101.168 CN2.C2
  Bottom Layer w0.5: U10.33 149.049,104.189 v1(149.149,104.089)
SIM_VCC: C102.2 CN2.C1 CN2.C6 U10.30 | length 27.2
  Top Layer w1: v1@146.736,108.788 153.213,108.788 156.007,105.994 CN2.C1 156.007,97.003 155.753,96.749 C102.2 154.737,96.418 CN2.C6
  Bottom Layer w0.7: U10.30 146.049,107.974 v1(146.787,108.712)
SW1: C27.2 P13.1 R28.1 U1.58 | length 48.8
  Top Layer w0.2: R28.1@52.248,92.939 R28.1 53.289,91.973 53.289,89.738 54.407,88.621 73.558,88.621 74.66,89.723 74.66,94.454 77.516,97.31 U1.58
  Top Layer w0.5: C27.2 52.172,93.015 R28.1@52.248,92.939 ; P13.1 51.994,93.269 R28.1
SWCLK: P3.1 U1.49 | length 9.9
  Top Layer w0.2: U1.49 86.675,103.85 84.963,105.562 84.963,108.28 P3.1
SWDIO: P3.2 U1.46 | length 7
  Top Layer w0.2: P3.2 88.976,109.753 88.976,108.026 89.675,107.327 U1.46 U1.46@89.625,103.86
TX3: P5.1 U1.51 | length 12.9
  Top Layer w0.2: P5.1 82.14,108.506 82.14,103.659 84.989,100.81 U1.51
V3.3: C6.2 C7.2 C8.2 C9.2 C10.2 C11.2 C12.2 C16.2 P1.1 P2.1 P3.3 P4.3 P5.3 R1.1 R2.2 R3.2 R9.2 R10.2 R24.2 R25.2 R28.2 SW2.1 SW2.2 U1.13 U1.19 U1.32 U1.48 U1.64 U3.4 U3.8 | length 250.9
  Top Layer w0.3: C11.2 84.887,93.32 85.877,94.31 U1.64 89.789,94.31 90.297,94.818 v1(90.297,96.596) ; 87.859,104.013 88.062,103.81 U1.48 ; v1(94.59,96.596) 94.675,96.511 U1.13 94.675,90.643 95.047,90.272 95.91,90.272 96.342,89.84 C9.2 ; U1.19 100.339,95.31 ; U1.32 98.863,101.81 100.152,103.099 C6.2
  Top Layer w0.4: v1(64.694,79.426) 65.049,79.426 65.563,79.94 U3.4
  Top Layer w0.5: C9.2 97.307,88.265 v1(97.307,85.979) ; v1(97.307,82.575) 97.307,80.086 96.85,79.629 R1.1 96.901,77.8 SW2.1 SW2.2
  Top Layer w0.7: v1(90.424,107.036) 90.424,108.153 91.973,109.703 P3.3
  Top Layer w0.8: 100.011,96.56 C7.2
  Top Layer w1: P1.1 67.691,86.385 68.631,85.446 ; R28.2 52.248,89.738 v1(52.299,89.687) ; R24.2 58.928,89.713 v1(58.979,89.662) ; v1@65.253,89.862 65.43,90.04 R25.2 ; R9.2@66.726,76.175 R10.2 69.088,76.149 69.444,76.149 72.187,73.406 77.851,73.406 78.74,74.295 78.74,82.982 78.031,83.691 74.905,83.691 74.905,83.693 76.378,85.166 76.378,91.948 v1(77.14,92.71) R3.2 R2.2 ; P5.3 78.74,108.433 v1(80.137,107.036) 80.137,100.711 80.797,100.051 v1@82.347,100.051 ; C8.2@83.49,91.415 C11.2 ; v1(85.725,106.959) 86.538,106.959 C12.2 86.995,104.877 87.859,104.013 ; C10.2 100.609,94.107 C7.2 ; C6.2 104.521,103.099 P2.1
  Bottom Layer w0.5: v1(97.307,82.575) v1(97.307,85.979)
  Bottom Layer w0.7: v1(64.694,79.426) 65.176,79.426 65.456,79.146 69.672,79.146 71.298,80.772 v1(71.298,83.947) v1(71.298,84.785) v1(71.298,85.496)
  Bottom Layer w0.8: 78.486,96.596 v1(90.297,96.596) v1(94.59,96.596) v1(99.67,96.596)
  Bottom Layer w1: P1.1 48.692,86.385 51.968,89.662 v1(58.979,89.662) v1(65.253,89.662) ; v1(77.14,92.71) 78.486,94.056 78.486,96.596 78.486,97.206 81.402,100.121 v1(82.347,100.121) 83.51,100.121 86.792,103.403 104.216,103.403 P2.1 ; v1(80.137,107.036) v1(90.424,107.036) 101.346,107.036 102.438,108.128 P4.3
V3.8: C103.2 C104.2 C105.2 C106.2 Q2.2 R15.2 U10.55 U10.56 U10.57 | length 29.1
  Top Layer w0.7: C104.2 C106.2 145.049,86.167 v1(145.049,85.003) ; v1(146.05,84.938) 146.05,85.75 C105.2 ; v1(147.049,84.946) 147.074,84.946 C103.2
  Bottom Layer w0.7: v1(144.755,77.673) 145.049,77.968 U10.57 v1(145.049,85.003) ; v1(145.796,77.699) 146.049,77.952 U10.56 v1(146.05,84.938) ; v1(146.787,77.699) 147.049,77.961 U10.55 v1(147.049,84.946)
pads on no net: P6.2 U1.1 U1.2 U1.11 U1.15 U1.20 U1.21 U1.25 U1.26 U1.27 U1.29 U1.33 U1.34 U1.37 U1.38 U1.39 U1.40 U1.41 U1.45 U1.50 U1.53 U1.54 U1.55 U1.59 U5.4 U5.5 U5.6 U5.7 U10.2 U10.4 U10.5 U10.6 U10.7 U10.8 U10.11 U10.12 U10.13 U10.14 U10.15 U10.19 U10.20 U10.21 U10.22 U10.23 U10.24 U10.25 U10.26 U10.34 U10.36 U10.38 U10.40 U10.41 U10.42 U10.43 U10.44 U10.47 U10.48 U10.49 U10.50 U10.51 U10.52 U10.65 U10.66 U10.67 U10.68

## Polygon pours and split planes (outlines as drawn)
NetC19_1 on Top Layer "Top Layer-No Net" (solid, pour order 8): 111.582,89.23 111.582,85.573 112.852,84.303 115.672,84.303 116.357,83.617 116.357,81.813 116.586,81.585 117.373,81.585 117.78,81.991 119.329,81.991 119.558,82.22 119.558,83.541 118.618,84.48 117.246,84.48 114.503,87.224 114.503,89.078 114.122,89.459 111.811,89.459
NetL1_1 on Top Layer "BATT" (solid, pour order 54): 72.009,81.483 74.447,79.045 76.784,79.045 77.394,78.435 77.394,75.54 76.987,75.133 72.873,75.133 70.917,77.089 70.917,80.416 70.333,81.001 68.301,81.001 68.301,81.483
V3.3 on Top Layer "BATT" (solid, pour order 46): 68.326,81.661 76.302,81.661 77.089,82.448 77.089,85.649 76.556,86.182 68.961,86.182 68.224,85.446 68.224,81.763
BATT on Top Layer "Top Layer-No Net" (solid, pour order 30): 116.408,78.08 118.618,78.08 119.405,78.867 123.19,78.867 123.774,78.283 123.774,73.482 123.292,73 119.837,73 119.507,73.33 119.507,75.87 119.101,76.276 116.637,76.276 116.256,76.657 116.256,77.826
NetC18_2 on Top Layer "Top Layer-No Net" (solid, pour order 18): 130.81,79.273 130.81,80.594 130.531,80.874 130.556,80.899 130.556,83.972 130.708,84.125 133.731,84.125 134.087,83.769 134.087,79.781 133.401,79.096 130.886,79.096 130.835,79.146
NetQ1_2 on Top Layer "Top Layer-No Net" (solid, pour order 28): 129.819,85.954 133.756,85.954 133.985,85.725 133.985,84.709 133.833,84.557 132.309,84.557 132.08,84.785 129.845,84.785 129.718,84.912 129.718,85.903
BATT on Top Layer "BATT" (solid, pour order 40): 63.703,81.356 64.719,80.34 67.056,80.34 67.081,80.366 67.081,80.797 67.031,80.848 65.456,80.848 65.202,81.102 65.202,81.509 65.329,81.636 67.056,81.636 67.107,81.686 67.107,82.474 66.446,83.134 62.84,83.134 62.56,82.855 62.56,81.559 62.763,81.356
NetC19_2 on Top Layer "BATT" (solid, pour order 88): 124.384,78.283 124.384,74.498 125.832,73.05 129.235,73.05 129.413,73.228 129.413,76.276 129.108,76.581 127.94,76.581 126.035,78.486 124.892,78.486
V3.8 on Top Layer "BATT" (solid, pour order 90): 125.12,83.718 125.12,80.315 128.295,77.14 131.14,77.14 131.394,77.394 131.394,78.08 131.191,78.283 128.6,78.283 126.492,80.391 126.492,83.769 126.365,83.896 125.273,83.896
NetC18_1 on Top Layer "BATT" (solid, pour order 92): 124.435,89.687 130.124,83.998 130.124,79.197 129.87,78.943 129.108,78.943 128.397,79.654 128.397,83.312 127.533,84.176 120.929,84.176 119.685,85.42 117.983,85.42 117.348,86.055 117.348,88.951 118.085,89.687
V3.8 on Top Layer "BATT" (solid, pour order 100): 130.277,78.283 146.939,78.283 147.574,77.648 147.574,76.403 146.837,75.667 131.877,75.667 130.302,77.241
BATT on Bottom Layer "BATT" (solid, pour order 120): 122.911,76.378 114.783,76.378 111.1,72.695 107.061,72.695 106.807,72.949 106.807,77.394 105.334,78.867 98.12,78.867 95.275,76.022 60.63,76.022 58.953,77.699 58.953,83.414 60.173,84.633 65.862,84.633 66.218,84.277 66.218,81.788 65.075,80.645 63.627,80.645 63.221,80.239 63.221,78.994 63.881,78.334 81.839,78.334 84.023,80.518 96.037,80.518 95.936,80.62 96.952,81.636 108.026,81.636 108.839,80.823 108.839,79.451 108.864,79.451 110.287,78.029 118.415,78.029 119.177,78.791 122.428,78.791 123.215,78.003 123.215,76.683
NetC19_2 on Bottom Layer "BATT" (solid, pour order 82): 114.3,84.125 121.945,84.125 128.346,77.724 128.346,76.683 127.584,75.921 125.552,75.921 124.765,76.708 124.765,78.511 122.733,80.543 119.456,80.543 117.246,82.753 114.681,82.753 114.198,83.236 114.198,84.049

## Keep-outs
Keep-Out Layer:
  lines w0.013: 44.913,93.554 ccw(c45.213,93.554) 45.213,93.254 45.613,93.254 cw(c45.613,92.954) 45.913,92.954 45.913,72.554 ccw(c46.213,72.554) 46.213,72.254 158.613,72.254 ccw(c158.613,72.554) 158.913,72.554 158.913,92.954 cw(c159.213,92.954) 159.213,93.254 159.613,93.254 ccw(c159.613,93.554) 159.913,93.554 159.913,111.954 159.913,114.954 ccw(c159.613,114.954) 159.613,115.254 74.213,115.254 ccw(c74.213,114.954) 73.913,114.954 73.913,111.954 73.913,97.554 cw(c73.613,97.554) 73.613,97.254 45.213,97.254 ccw(c45.213,96.954) 44.913,96.954 44.913,93.554

## Silkscreen, mask and mechanical layers (free items; w line width, h text height)
Top Overlay:
  text "DK-LOCK-V1.0" at 46.609,76.581 h1.5
  text "2018-03-03" at 47.498,74.092 h1.5
Bottom Solder:
  lines w0.013: 73.913,111.954 73.913,114.954 ; 159.913,111.954 159.913,114.954